# Altium PCB Antenna_base_v2.PcbDoc (part 2 of 2)
Units mil, origin at the board's own origin, x right, y up, seen from the top; angles counter-clockwise.
Board outline 2055 x 2630 mil, 2 copper layers (Top Layer, Bottom Layer); 67 components, 71 nets, 329 pads, 71 vias.
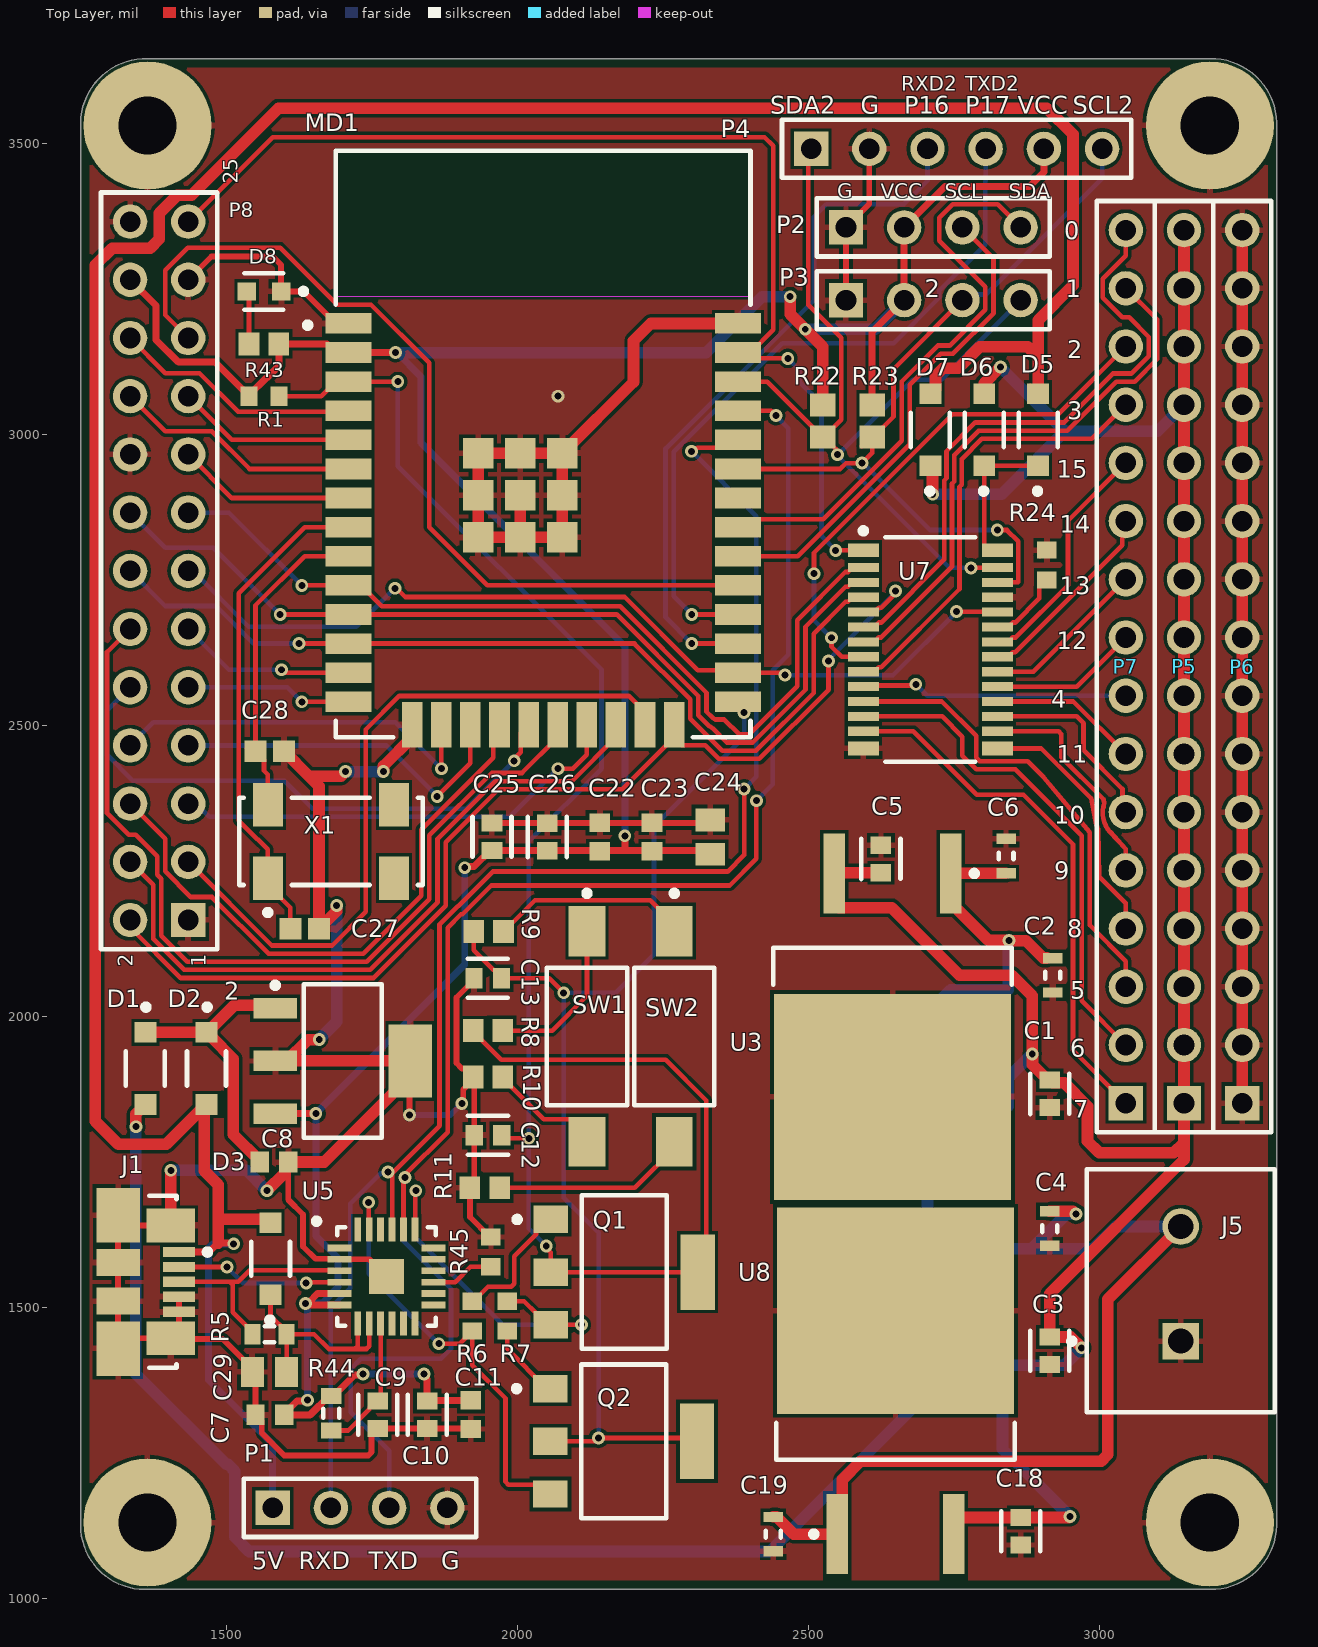
[diagram p0: Top Layer view]

## Via types
v1: diameter 22, hole 12, Top Layer to Bottom Layer, 71 vias

## Nets (pads, with @x,y where several pads share a name; then routed paths per layer and width w, separated by ;. In a path a pad name is that pad's centre, name@x,y a point inside that pad or via, vN(x,y) a via of type N, cw(c..) or ccw(c..) an arc to the next point about the centre after c; other vN are vias at no path point) (continued)
SENSOR_VP: (continued)
  Top Layer w8: P8.22 1395.47,3104.53 1454.24,3104.53 1520.5,3038.27 1708.27,3038.27 MD1.4
TXD0: MD1.35 P1.3 U5.20 | length 2814.9
  Top Layer w8: U5.20 v1@1804.87,1720.17 ; v1@1806.18,1726.18 1880.69,1800.69 1880.69,2151.92 1903.5,2174.72 1906.07,2174.72 1955.67,2224.33 2365,2224.33 2411,2270.33 v1(2411,2370) ; MD1.35@2383.29,3036 MD1.35 2436.21,3040 ; MD1.35@2383.29,3040 2436.21,3040 ; v1(2444.54,3031.67) 2436.21,3040
  Bottom Layer w8: P1.3@1780,1165 1780,1253.26 1714,1319.26 1714,1393.7 1731.35,1411.05 1869.05,1411.05 1886.41,1428.41 1886.41,1531.52 1804.87,1613.07 1804.87,1720.17 v1(1807.35,1722.65) ; v1(2411,2370) 2439.41,2398.41 2439.41,2594.44 2466,2621.03 2466,3010.21 v1(2444.54,3031.67)
USB5V: C29.2 D3.1 R5.1 U5.7 U5.8 | length 383.2
  Top Layer w8: D3.1 1576.3,1485.16 1604.09,1457.36 R5.1 ; C29.2 R5.1 ; U5.7 1726.13,1432.9 1721.3,1428.07 ; U5.8 1745.81,1432.76 1741.12,1428.07 1721.3,1428.07 ; R5.1 1650.94,1453.43 1676.3,1428.07 1721.3,1428.07
USB5V4: D2.2 D3.2 D5.2 D7.2 J1.1 P1.1 | length 5231.1
  Top Layer w8: D5.2@2881.28,3083.01 D5.2
  Top Layer w12: J1.1 1470.83,1594.61 1486.3,1610.08 1511.63,1610.08 v1(1512.96,1608.75)
  Top Layer w20: 1486.3,1610.08 1486.3,1651.06 ; D3.2 1570.32,1651.06 1486.3,1651.06 ; D7.2 2710.98,3069.29 2718.7,3077.01 2718.7,3100.27 2731.72,3113.28 2758.28,3113.28 2795,3150 2877.45,3150 2895,3132.45 ; D5.2 2895,3132.45 ; 1486.3,1651.06 1486.3,1710.2 1462.24,1734.26 1462.24,1844.02 1461.26,1844.02 1397.24,1780 1315,1780 1275.47,1819.53 1275.47,3290.47 1304.47,3319.47 1369.47,3319.47 1385,3335 1385,3379.39 1416.14,3410.53 1440.53,3410.53 1590,3560 2910,3560 2955,3515 2955,3255.61 2895,3195.61 2895,3132.45
  Bottom Layer w12: v1(1512.96,1608.75) 1477.03,1608.75 1470,1601.72 1470,1375 1580,1265 P1.1@1580,1165
VCC: 2.3 C7.2 C10.1 C11.2 C22.2 C23.2 C24.2 C25.1 C26.1 MD1.2 P2.2 P3.2 P4.5 P8.24 R1.1 R22.2 R23.2 R43.1 R44.2 U5.5 U5.6 | length 5551.9
  Top Layer w12: P8.24 1379.47,3220.53 1379.47,3161.8 1417.8,3123.47 1480.94,3123.47 1528.68,3075.73 1530.65,3075.73 R1.1@1539.41,3066.97 ; R1.1 R1.1@1539.41,3066.97 ; 2.3 v1(1654.06,1832.4) ; v1(1640,1340) 1638.85,1338.85 1621.49,1338.85 1599.61,1316.97 C7.2 1644.53,1315 1676.54,1347.01 R44.2 1684.41,1347.01 1720.49,1383.09 1733.09,1383.09 v1(1735,1385) ; U5.6 1641.64,1503.43 1639.01,1506.06 v1(1636.3,1506.06) 1638.21,1507.98 1642.07,1507.98 1657.2,1523.11 U5.5 ; v1(1790.9,3139.81) 1790.7,3140 MD1.2 1688.35,3140 1673.35,3155 R43.1 1590.59,3117.31 1569.8,3096.52 1568.96,3096.52 R1.1@1539.41,3066.97 ; v1@1845.47,1376.82 C10.1 1845.96,1339.31 C11.2@1919.98,1339.31 ; v1(1910,2255) 1911.91,2256.91 1926.2,2256.91 1953.78,2284.49 C25.1 2185,2284.49 ; v1(2185,2309.73) 2185,2284.49 ; C24.2 2325.24,2284.49 2185,2284.49 ; R23.2 2610,3175 P3.2 P2.2 2735,3425 2880,3425 2905,3450 P4.5
  Top Layer w20: v1(2469.2,3235.94) 2469.2,3205.8 v1(2495,3180) 2525,3150 R22.2
  Bottom Layer w12: v1(1636.3,1506.06) 1637.5,1507.27 1665.3,1507.27 1692.24,1534.21 1692.24,1584.21 1654.06,1622.4 v1(1654.06,1832.4) 1910,2088.35 v1(1910,2255) ; v1(1640,1340) 1640,1495.29 ; v1(1735,1385) v1(1840,1385) ; v1@1793.6,3139.81 1835,3098.41 1835,2985 2185,2635 v1(2185,2309.73)
  Bottom Layer w20: v1(1790.9,3139.81) 1793.6,3139.81 2324.56,3139.81 2420.69,3235.94 v1(2469.2,3235.94) ; v1(2495,3180) 2615,3180 P3.2
pads on no net: MD1.32 U5.1 U5.10 U5.11 U5.12 U5.13 U5.14 U5.16 U5.17 U5.18 U5.22 U5.24 X1.2 X1.3

## Polygon pours and split planes (outlines as drawn)
GND on Top Layer "GND_L01_P001" (solid, pour order 1): 1255,3650 1260,3645 3315,3645 3315,1020 3305,1010 1250,1010 1250,3640 1255,3645
no net on Top Layer "NONET_L01_P000" (solid, pour order 0): 1350,3645
GND on Bottom Layer "GND_L02_P002" (solid, pour order 2): 1250,3645 1250,1010 3310,1010 3310,3650 1245,3650

## Other copper
Top Layer:
  pour cut-out: 1721.3,1498.6 1721.3,1606.68 1829.38,1606.68 1829.38,1498.6
  pour cut-out: 1721.3,1498.6 1721.3,1606.68 1829.38,1606.68 1829.38,1498.6

## Silkscreen, mask and mechanical layers (free items; w line width, h text height)
Top Overlay:
  text "RXD2" at 2660,3590 h25
  text "TXD2" at 2770,3590 h25
  text "SDA2" at 2435,3550 h30
  text "G" at 2590,3550 h30
  text "P16" at 2665,3550 h30
  text "P17" at 2770,3550 h30
  text "VCC" at 2860,3550 h30
  text "SCL2" at 2955,3550 h30
  text "G" at 2550,3405 h25
  text "VCC" at 2625,3405 h25
  text "SCL" at 2735,3405 h25
  text "SDA" at 2845,3405 h25
  text "0" at 2940,3335 h30
  text "2" at 2700,3235 h30
  text "1" at 2942.5,3235 h30
  text "2" at 2945,3130 h30
  text "3" at 2945,3025 h30
  text "15" at 2927.51,2925 h30
  text "14" at 2932.51,2830 h30
  text "13" at 2932.51,2725 h30
  text "12" at 2927.51,2630 h30
  text "4" at 2917.51,2530 h30
  text "11" at 2927.51,2435 h30
  text "10" at 2922.51,2330 h30
  text "9" at 2922.51,2235 h30
  text "8" at 2945,2135 h30
  text "5" at 2950,2030 h30
  text "6" at 2950,1930 h30
  text "7" at 2955,1825 h30
  text "5V" at 1545,1050 h30
  text "RXD" at 1625,1050 h30
  text "TXD" at 1745,1050 h30
  text "G" at 1870,1050 h30
Bottom Overlay:
  drawing of 11 lines, arcs and shapes, not listed
  text "P23 GND" at 1680,3345 h26
  text "GND VCC" at 1675,3250 h26
  text "P5 SENP" at 1700,3145 h30
  text "SEN P34" at 1700,3040 h30
  text "P35 GND" at 1705,2945 h30
  text "P25 P26" at 1705,2845 h30
  text "P4  P27" at 1705,2745 h30
  text "P14 CLK" at 1705,2645 h30
  text "P12 CMD" at 1710,2545 h30
  text "Red Balloon Security" at 2195,2500 h40
  text "SD2 P13" at 1710,2440 h30
  text "SD0 SD3" at 1715,2340 h30
  text "P15 SD1" at 1705,2240 h30
  text "GND P2" at 1695,2145 h30
  text "nyan-sat.com" at 2135,1875 h60
  text "I2C_SCL2 IO21 / I2C_SDA2 IO22 / RXD2 IO16 / TXD2 IO17 / I2C_SCL IO18 / I2C_SDA IO19" at 1920,1395 h30
Mechanical 1:
  the board outline again, w10

## Text inside footprints (layer, text, board x,y; h text height)
J1: Mechanical 6 "PCB EDGE" at 1253.07,1826.89 h11.81 r270
P8: Top Overlay "2" at 1340,2085 h25 r90; Top Overlay "1" at 1465,2085 h25 r90; Top Overlay "25" at 1520,3430 h25 r90